# Altium PCB Beacon.PcbDoc
Units mm, origin at the board's own origin, x right, y up, seen from the top; angles counter-clockwise.
Board outline 47.6 x 56 mm, 2 copper layers (Top Layer, Bottom Layer); 43 components, 49 nets, 154 pads, 84 vias.
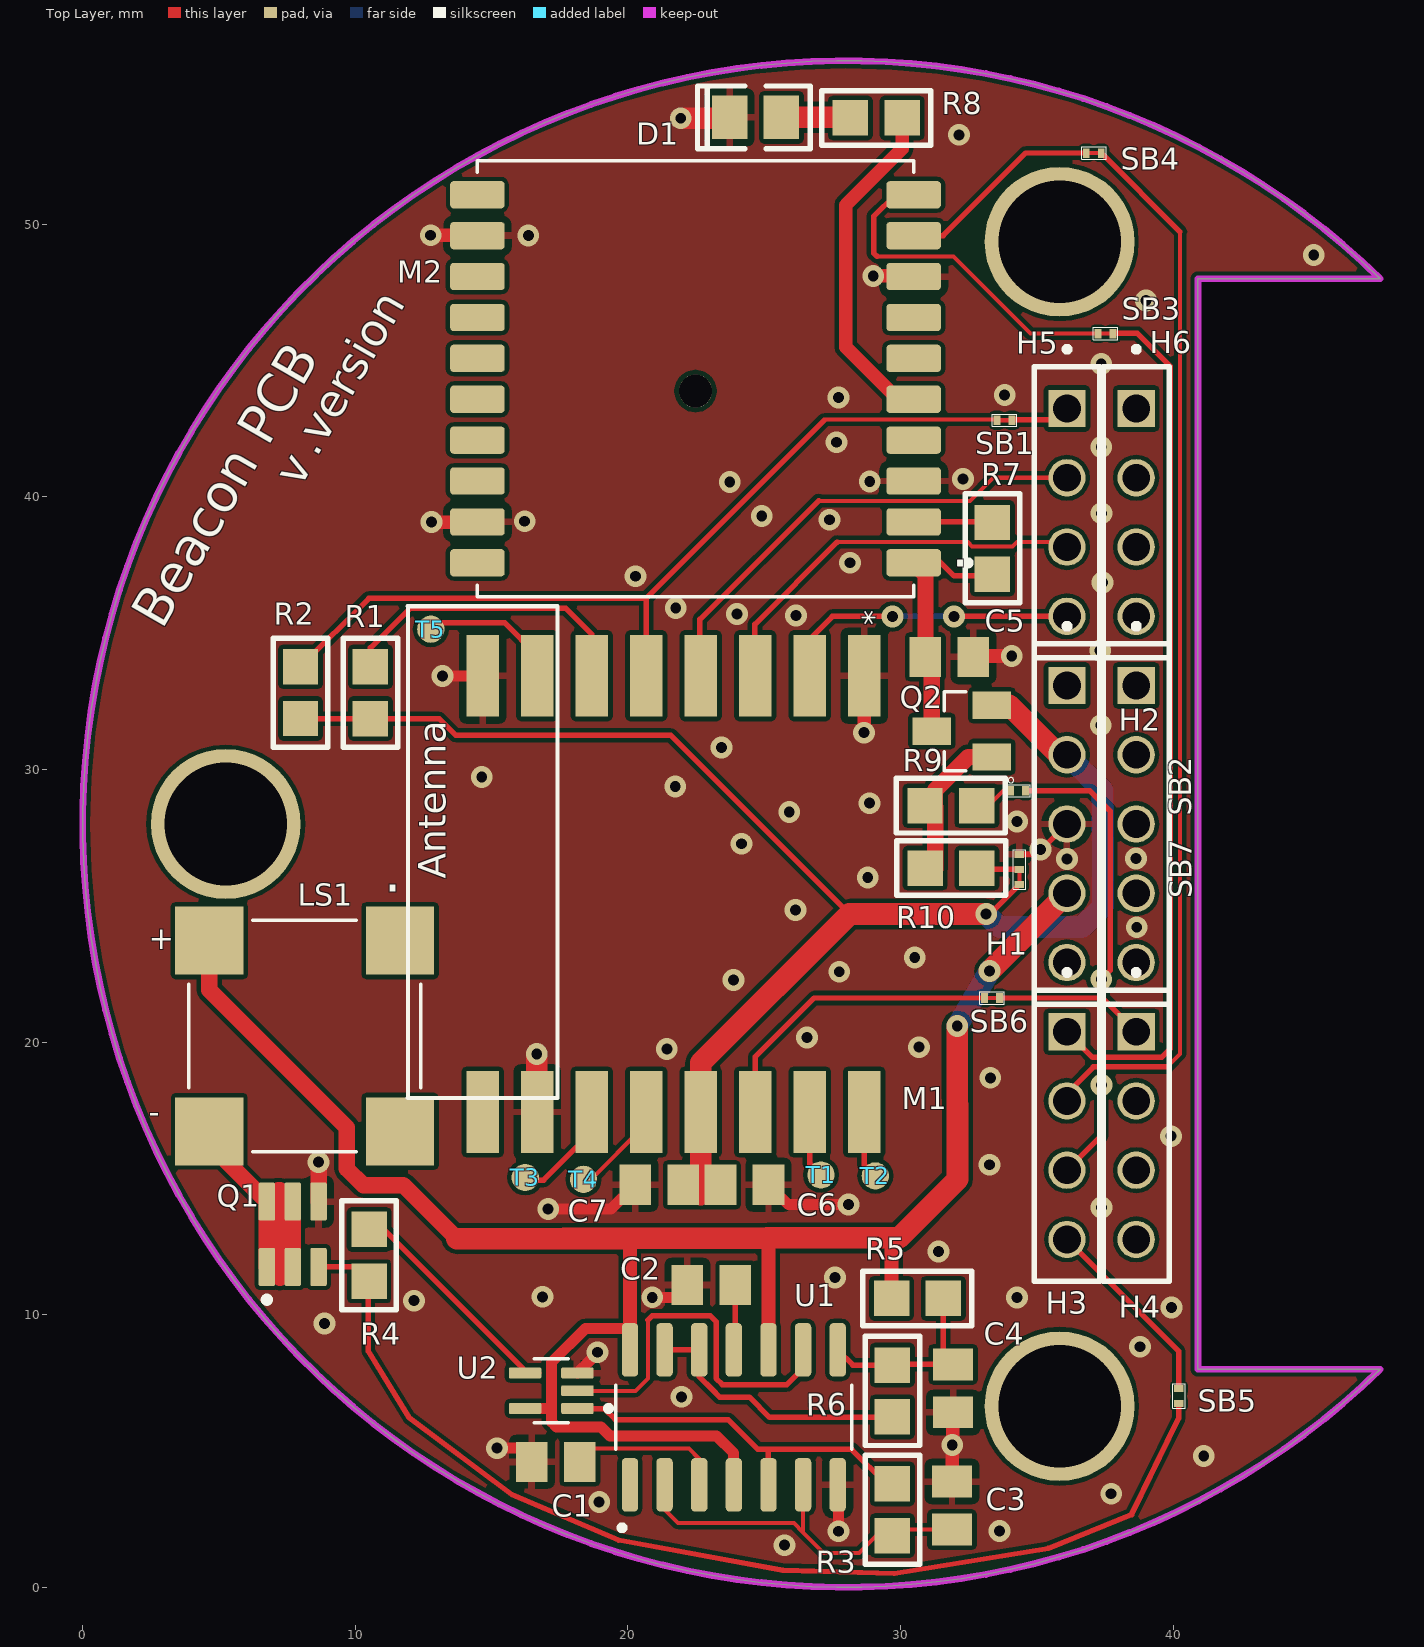
[diagram p0: Top Layer view]
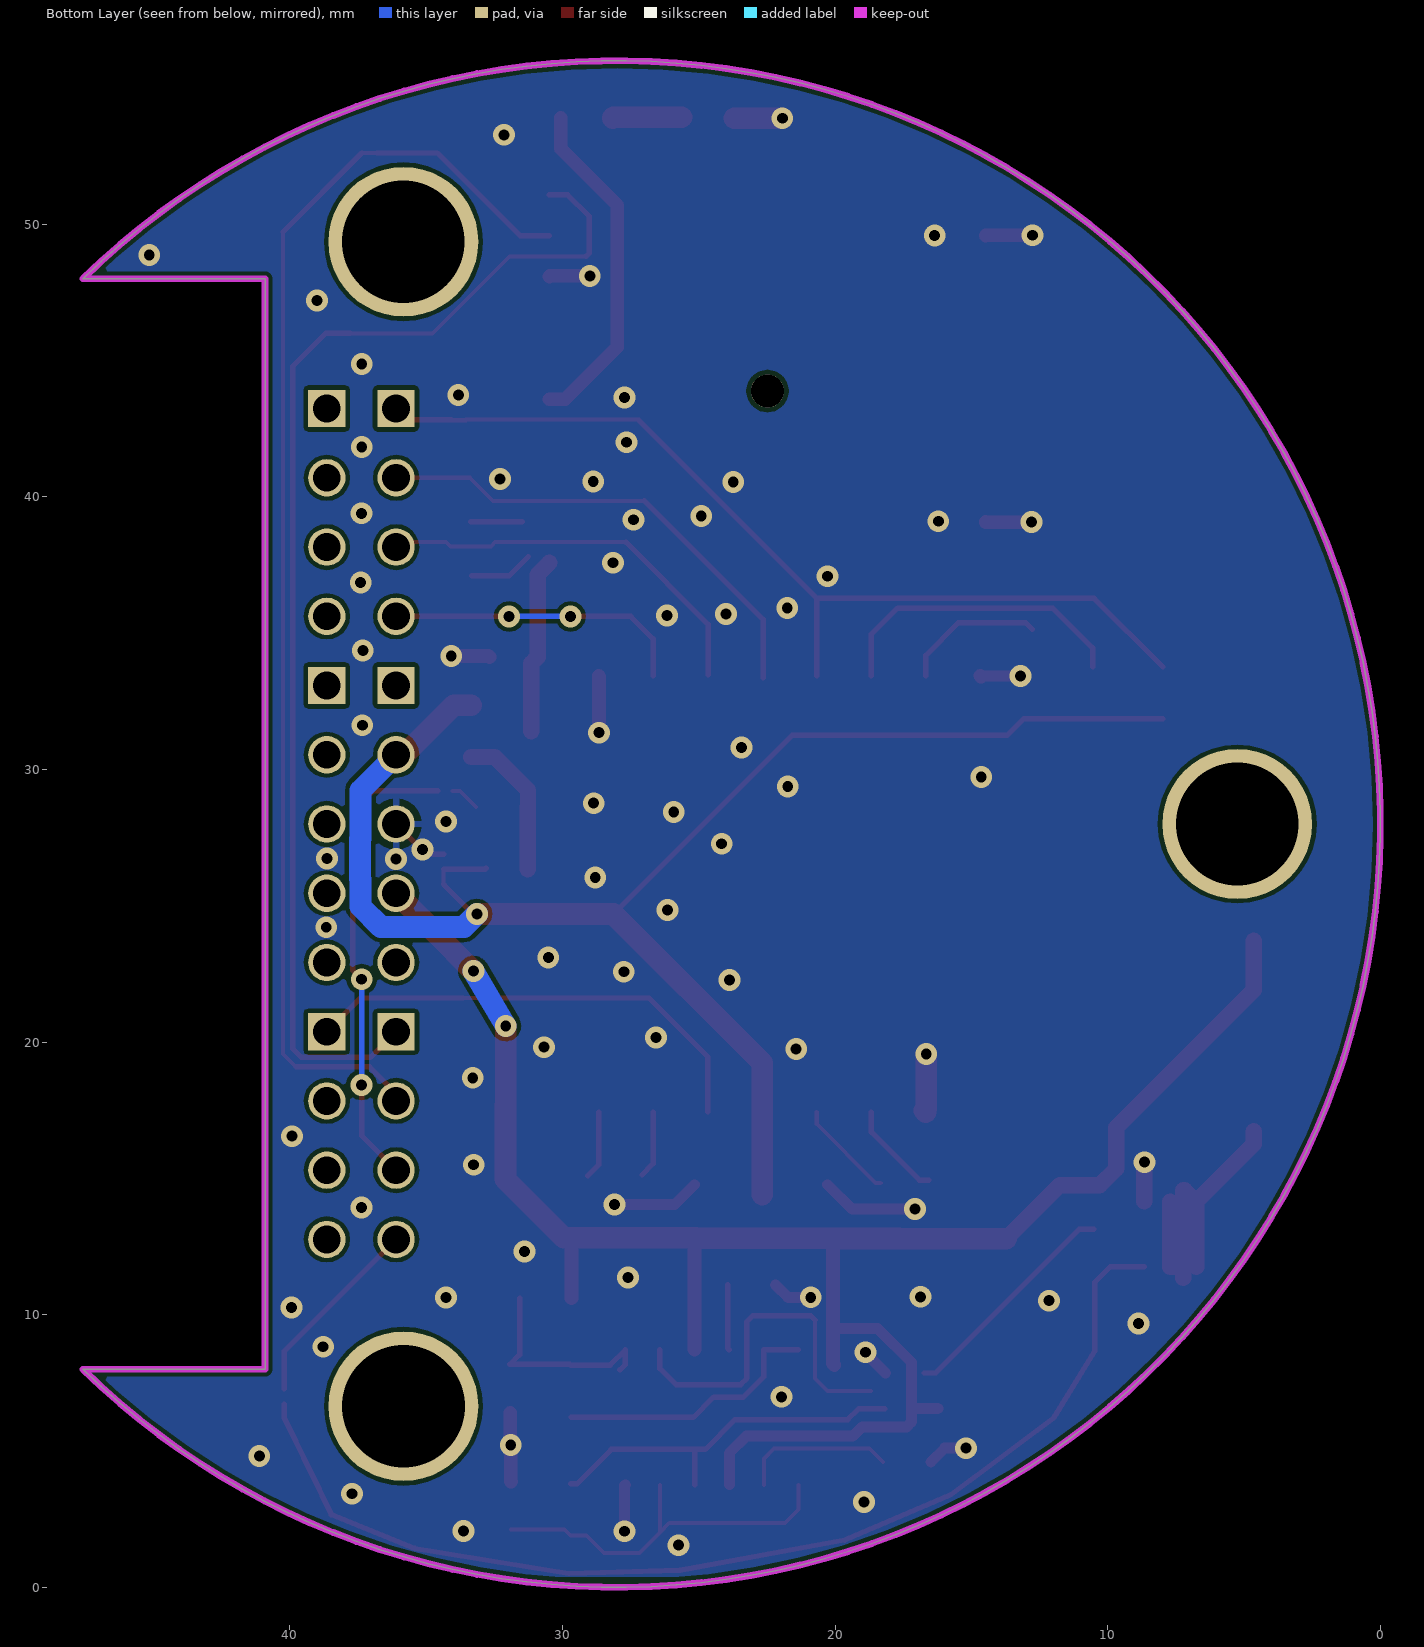
[diagram p1: Bottom Layer view, seen from below]

## Layer stack, top to bottom
Top Solder: solder mask 0.0102, Solder Resist, Dk 3.5
Top Layer: signal copper 0.0356
Dielectric 1: dielectric 0.32, FR-4, Dk 4.8
Bottom Layer: signal copper 0.0356
Bottom Solder: solder mask 0.0102, Solder Resist, Dk 3.5

## Board outline
47.596,8 cw(c28,28) 47.596,48 47.6,48 40.913,48 40.913,8

## Design rules (kind name [scope] priority, off if disabled: settings)
Clearance [All] p1: gap=0.152 ignorepadtopadclearanceinfootprint=FALSE except(0: Arc-Hole Track-Hole SMDPad-Hole THPad-Hole Via-Hole Fill-Hole Poly-Hole Region-Hole Text-Hole)
ComponentClearance [All] p1: gap=0.126 collisioncheckmode=3 verticalgap=0.254 showdistances=FALSE
HoleSize [All] p1: absolutevalues=TRUE maxlimit=6.3 minlimit=0.3 maxpercent=80.000 minpercent=20.000
PolygonConnect ViaConnect [All vs IsVia] p1: connectstyle=Direct reliefconductorwidth=0.254 reliefentries=4 polygonreliefangle="90 Angle" airgapwidth=0.254
PolygonConnect [All] p2: connectstyle=Relief reliefconductorwidth=0.254 reliefentries=4 polygonreliefangle="90 Angle" airgapwidth=0.254
RoutingVias [All] p1: holewidth=0.3 width=0.6 viastyle="Through Hole" minholewidth=0.3 minwidth=0.5 maxholewidth=1 maxwidth=5
SolderMaskExpansion [All] p1: expansion=0.102
Width [All] p1: maxlimit=25.4 minlimit=0.15 preferedwidth=0.152
28 further rules are at their usual default settings.

## Components (designator, comment, footprint, x,y, rotation, side; value= is the part's Value field where it differs from the comment)
C1 "100nF" CAPC2012X94N 17.361,4.604 r0 top
C2 "100nF" CAPC2012X94N 23.064,11.093 r0 top
C3 "1nF" CAPC2012X94N 31.891,2.999 r270 top
C4 "1uF" CAPC2012X94N 31.934,7.295 r90 top
C5 "10uF" CAPC2012X94N 31.795,34.128 r180 top
C6 "10uF" CAPC2012X94N 24.278,14.766 r180 top
C7 "100nF" CAPC2012X94N 21.156,14.767 r180 top
D1 "LTST-C170KGKT" ECE-LED2012-0805SM 24.684,53.922 r180 top
H1 "SSQ-105-03-S-S" SAMTEC_SSQ-105-03-S-S 36.107,28 r270 top locked
H2 "SSQ-105-03-S-S" SAMTEC_SSQ-105-03-S-S 38.647,28 r270 top locked
H3 "SSQ-104-02-S-S" *SAMTEC_SSQ-104-02-S-S_SSQ-104-02-S-S(Primary) 36.107,16.57 r270 top locked
H4 "SSQ-104-02-S-S" *SAMTEC_SSQ-104-02-S-S_SSQ-104-02-S-S(Primary) 38.647,16.57 r270 top locked
H5 "SSQ-104-02-S-S" *SAMTEC_SSQ-104-02-S-S_SSQ-104-02-S-S(Primary) 36.107,39.43 r270 top locked
H6 "SSQ-104-02-S-S" *SAMTEC_SSQ-104-02-S-S_SSQ-104-02-S-S(Primary) 38.647,39.43 r270 top locked
LS1 "CMT-8504-100-SMT-TR" XDCR_CMT-8504-100-SMT-TR 8.146,20.223 r0 top
M1 "LORA127X-C1" LORA127X-C1 13.674,33.435 r270 top
M2 "CD-PA1616D" XCVR_CD-PA1616D 22.482,44.331 r180 top
Q1 "TSM3446CX6_RFG" SOT-26-6 7.706,11.751 r0 top
Q2 "SSM3J328R,LF" SOT95P240X88-3N 32.25,31.407 r90 top
R1 "180k" 0805 10.558,32.818 r270 top
R2 "180k" 0805 7.991,32.819 r270 top
R3 "180k" 0805 29.703,2.848 r270 top
R4 "1k" 0805 10.511,12.178 r90 top
R5 "1Meg" 0805 30.622,10.601 r180 top
R6 "39k" 0805 29.703,7.202 r270 top
R7 "180k" 0805 33.372,38.11 r270 top
R8 "1k" 0805 29.11,53.901 r0 top
R9 "1k" 0805 31.85,28.67 r180 top
R10 "39k" 0805 31.855,26.379 r0 top
SB1 "Solder Jumper Normally Closed 0201" "SOLDER BRIDGE CLOSED 0201" 33.814,42.81 r0 top net-tie
SB2 "Solder Jumper Normally Open 0201" "Solder Bridge Open 0201"#1 34.309,29.217 r0 top
SB3 "" "Solder Bridge Closed 0201" 37.518,45.988 r0 top net-tie
SB4 "Solder Jumper Normally Closed 0201" "Solder Bridge Closed 0201" 37.091,52.613 r0 top net-tie
SB5 "Solder Jumper Normally Open 0201" "Solder Bridge Open 0201"#2 40.213,7.016 r90 top
SB6 "Solder Jumper Normally Closed 0201" "Solder Bridge Closed 0201" 33.357,21.618 r0 top net-tie
SB7 "Solder Jumper 3-pin Normally Closed 0201" "Solder Bridge 3-pin Left shorted 0201" 34.363,25.783 r90 top net-tie
T1 "Test Pad" "TEST PAD" 27.081,15.125 r0 top
T2 "Test Pad" "TEST PAD" 29.074,15.091 r0 top
T3 "Test Pad" "TEST PAD" 16.231,15.032 r0 top
T4 "Test Pad" "TEST PAD" 18.368,14.964 r0 top
T5 "Test Pad" "TEST PAD" 12.768,35.144 r0 top
U1 "TLC556CDR" SOIC127P600X175-14N 23.887,6.234 r90 top
U2 "SN74AHC1G02DCKR" SOT65P210X110-5N 17.19,7.212 r180 top

## Footprints (in the part's own frame and the unit in brackets; to place one, negate y for a bottom-side part, rotate by r counter-clockwise, add the part's x,y. Pads: shape width x height; smd on the part's side, far side on the other; paste and mask are expansions set on the pad)
0805 [mm]
  rect 1.3x1.3 smd: 1(-0.95,0) 2(0.95,0)
  silkscreen extent -2,-1 2,1, body extent -1.1,-0.72 1.1,0.73, height 1.1
*SAMTEC_SSQ-104-02-S-S_SSQ-104-02-S-S(Primary) [mm]
  rect 1.37x1.37 hole 1.02: 01(-3.81,0)
  round 1.37 hole 1.02: 02(-1.27,0) 03(1.27,0) 04(3.81,0)
  silkscreen extent -6.08,-1.2 5.34,1.2
CAPC2012X94N [mm]
  rect 1.16x1.47 smd: 1(-0.88,0) 2(0.88,0)
  body extent -1.02,-0.7 1.02,0.7, height 1.23
ECE-LED2012-0805SM [mm] "RED AS AlGaAs SMD LED, Body; 2mm x 1.25 mm (LxW)"
  rect 1.3x1.6 smd: 1(-0.95,0) 2(0.95,0)
  silkscreen extent -2,-1.15 2.13,1.15
LORA127X-C1 [mm]
  rect 3x1.2 smd paste+0 mask+0: 1(0,15) 2(0,13) 3(0,11) 4(0,9) 5(0,7) 6(0,5) 7(0,3) 8(0,1) 9(16,1) 10(16,3) 11(16,5) 12(16,7) 13(16,9) 14(16,11) 15(16,13) 16(16,15)
  body extent 0,0 16,16, height 2.1
SAMTEC_SSQ-105-03-S-S [mm]
  rect 1.37x1.37 hole 1.02: 1(-5.08,0)
  round 1.37 hole 1.02: 2(-2.54,0) 3(0,0) 4(2.54,0) 5(5.08,0)
  silkscreen extent -7.35,-1.2 6.61,1.2, body extent -6.6,-1.21 6.6,1.21, height 8.51
SOIC127P600X175-14N [mm]
  rrect50% 1.97x0.6 smd: 1(-2.475,3.81) 2(-2.475,2.54) 3(-2.475,1.27) 4(-2.475,0) 5(-2.475,-1.27) 6(-2.475,-2.54) 7(-2.475,-3.81) 8(2.475,-3.81) 9(2.475,-2.54) 10(2.475,-1.27) 11(2.475,0) 12(2.475,1.27) 13(2.475,2.54) 14(2.475,3.81)
  silkscreen extent -4.15,-4.33 1.17,4.33, body extent -3,-4.28 3,4.28, height 1.8
"Solder Bridge 3-pin Left shorted 0201" [mm]
  rect 0.25x0.35 smd paste-100 mask+0: 1(0.55,0) 2(0,0) 3(1.1,0)
  Top Layer lines w0.15: 0,0 0.55,0
  silkscreen extent -0.18,-0.23 1.27,0.23
"SOLDER BRIDGE CLOSED 0201" [mm]
  rect 0.25x0.35 smd paste+0 mask+0: 1(-0.275,0) 2(0.275,0)
  Top Layer lines w0.15: -0.275,0 0.275,0
  silkscreen extent -0.45,-0.23 0.45,0.23
"Solder Bridge Closed 0201" [mm]
  rect 0.25x0.35 smd paste+0 mask+0: 1(-0.275,0) 2(0.275,0)
  Top Layer lines w0.15: -0.275,0 0.275,0
  silkscreen extent -0.45,-0.23 0.45,0.23
"Solder Bridge Open 0201"#1 [mm]
  rect 0.25x0.35 smd paste-100 mask+0: 1(-0.275,0) 2(0.275,0)
  silkscreen extent -0.45,-0.23 0.45,0.23
"Solder Bridge Open 0201"#2 [mm]
  rect 0.25x0.35 smd paste+0 mask+0: 1(-0.275,0) 2(0.275,0)
  silkscreen extent -0.45,-0.23 0.45,0.23
SOT65P210X110-5N [mm]
  rrect25% 1.19x0.4 smd: 1(-0.96,0.65) 2(-0.96,0) 3(-0.96,-0.65) 4(0.96,-0.65) 5(0.96,0.65)
  silkscreen extent -2.2,-1.17 0.63,1.17, body extent -1.05,-1 1.05,1, height 1.1
SOT95P240X88-3N [mm]
  rect 1x1.4 smd: 1(-0.95,-1.1) 2(0.95,-1.1) 3(0,1.1)
  silkscreen extent -1.9,-1.9 1.45,0.65, body extent -1.4,-1.2 1.4,1.2, height 0.88
SOT-26-6 [mm]
  rrect20% 0.6x1.4 smd: 1(-0.95,0) 2(0,0) 3(0.95,0) 4(0.95,2.4) 5(0,2.4) 6(-0.95,2.4)
  silkscreen extent -1.05,-1.3 -0.85,-1.1, body extent -1.43,-0.18 1.48,2.62, height 1.55
"TEST PAD" [mm] "Exposed copper pad"
  round 1 smd: 1(0.004,0.001)
XCVR_CD-PA1616D [mm]
  rrect25% 2x1 smd: 1(-8,6.75) 2(-8,5.25) 3(-8,3.75) 4(-8,2.25) 5(-8,0.75) 6(-8,-0.75) 7(-8,-2.25) 8(-8,-3.75) 9(-8,-5.25) 10(-8,-6.75) 11(8,-6.75) 12(8,-5.25) 13(8,-3.75) 14(8,-2.25) 15(8,-0.75) 16(8,0.75) 17(8,2.25) 18(8,3.75) 19(8,5.25) 20(8,6.75)
  round 1.21 hole 1.21 unplated: ""(0,0.45)
  silkscreen extent -10.1,-8 8,8, body extent -8,-8 8,8, height 6.7
XDCR_CMT-8504-100-SMT-TR [mm]
  rect 2.5x2.5 smd: 1(3.5,3.5) 2(3.5,-3.5) N(-3.5,-3.5) P(-3.5,3.5)
  silkscreen extent -4.25,-4.25 4.25,4.25, body extent -4.25,-4.25 4.28,4.28, height 4

## Part data
C1 C2 C3 C4 C5 C6 C7: library part "CAP 0805", "Capacitor", IsInLabBook=Yes
D1: library part LED, "LED"
H1 H2: Package=None, Availability=Unavailable, MF="{'manufacturer': u'Samtec Inc.'}", MP=SSQ-105-03-S-S, Price=None
LS1: "8.5 mm, 5 Vo-p, 100 dB, Surface Mount (SMT), Magnetic Audio Transducer Buzzer", Package="CUI Devices", Availability="In Stock", Check_prices=https://www.snapeda.com/parts/CMT-8504-100-SMT-TR/CUI+Devices/view-part/?ref=eda, CUI_purchase_URL=https://www.cuidevices.com/product/audio/buzzers/audio-transducers/cmt-8504-100-smt-tr?utm_source=snapeda.com&utm_medium=referral&utm_campaign=snapedaBOM, MF="CUI Devices", MP=CMT-8504-100-SMT-TR, Price=None, Purchase-URL=https://pricing.snapeda.com/search/part/CMT-8504-100-SMT-TR/?ref=eda, SnapEDA_Link=https://www.snapeda.com/parts/CMT-8504-100-SMT-TR/CUI+Devices/view-part/?ref=snap
M1: "LoRa transceiver"
M2: "CD-PA1616D GNSS patch antenna module", Package=Package, Availability="Not in stock", Check_prices=https://www.snapeda.com/parts/CD-PA1616D/CD+Top/view-part/?ref=eda, MF="CD Top", MP=CD-PA1616D, Price=None, SnapEDA_Link=https://www.snapeda.com/parts/CD-PA1616D/CD+Top/view-part/?ref=snap
Q1: "N-channel MOSFET", Package=None, Availability=Unavailable, MF="{'manufacturer': u'Taiwan Semiconductor'}", MP=TSM3446CX6_RFG, Price=None
Q2: "P-Channel MOSFET 20V 6A _Ta_ 1W _Ta_ Surface Mount SOT-23F", Package="SOT-23 Toshiba", Availability=Unavailable, MF=Toshiba, MP=SSM3J328R,LF, Price=None, SnapEDA_Link=https://www.snapeda.com/parts/SSM3J328R,LF/Toshiba%20Semiconductor%20and%20Storage/view-part/214715/?ref=snap
R1 R2 R3 R4 R5 R6 R7 R8 R9 R10: library part Resistor, "Resistor", IsInLabBook=Yes
SB3: library part "Solder Jumper Normally Closed 0201", DEBUG=DEBUG
U1: "Dual 555 Timer", Package=None, Availability=Unavailable, MP=TLC556CDR, Price=None
U2: "NOR gate", Package=None, Availability=Unavailable, MP=SN74AHC1G02DCKR, Price=None
H3 H4 H5 H6: Check_prices=https://www.snapeda.com/parts/SSQ-104-02-S-S/Samtec/view-part/?ref=eda, SnapEDA_Link=https://www.snapeda.com/parts/SSQ-104-02-S-S/Samtec/view-part/?ref=snap
SB1 SB2 SB4 SB5 SB6 SB7: DEBUG=DEBUG

## Free pads (board coordinates)
  round 5.5 hole 4.5: 1(5.25,28) 1(35.837,6.643) 1(35.837,49.357)

## Via types
v1: diameter 0.8, hole 0.4, Top Layer to Bottom Layer, tented both sides, 78 vias
v2: diameter 0.8, hole 0.4, Top Layer to Bottom Layer, tented bottom, 6 vias

## Nets (pads, with @x,y where several pads share a name; then routed paths per layer and width w, separated by ;. In a path a pad name is that pad's centre, name@x,y a point inside that pad or via, vN(x,y) a via of type N, cw(c..) or ccw(c..) an arc to the next point about the centre after c; other vN are vias at no path point)
1V8: H1.1
1V8_EN: H2.3
1V8_PG: H2.1
3V3: C6.2 C7.1 H1.2 M1.13 Q2.2 R1.2 R2.2 SB7.2 | length 56.7
  Top Layer w0.2: R2.2 10.557,31.869 R1.2 13.073,31.868 13.678,31.263 21.571,31.263 28.135,24.699 ; v2(33.143,24.699) 33.279,24.699 SB7.2
  Top Layer w0.8: 22.674,14.411 22.674,14.767 M1.13 22.674,19.239 28.135,24.699 v2(33.143,24.699) ; Q2.2 33.989,32.357 35.806,30.54 H1.2
  Bottom Layer w0.8: v2(33.143,24.699) 33.62,24.223 36.66,24.223 37.41,24.972 37.41,25.973 37.429,25.992 37.429,27.448 37.41,27.468 37.41,29.237 H1.2
3V3_EN: H2.4
3V3_PG: H2.2
5V: H1.4 LS1.P R5.2 U1.4 U1.10 U1.14 U2.5 | length 73.3
  Top Layer w0.4: U2.5 17.193,6.562 17.199,6.568 ; U1.14@20.042,9.497 18.443,9.497 17.199,8.254 17.199,6.568 ; U1.14@20.077,9.292 U1.14@20.084,9.292 ; U1.4@23.87,3.776 23.87,4.934 23.25,5.553 19.35,5.553 19.018,5.885 17.386,5.885 17.199,6.071 17.199,6.568
  Top Layer w0.5: U1.14@20.027,8.154 20.077,8.204 U1.14 20.077,9.292 20.077,12.779 20.058,12.798 ; U1.14@20.084,8.716 U1.14@20.084,9.292 ; 25.11,12.81 25.157,12.763 U1.10 ; R5.2 29.672,12.539 29.953,12.82
  Top Layer w0.6: LS1.P 4.646,21.91 9.692,16.864 9.692,15.358 10.3,14.75 11.767,14.75 13.732,12.785
  Top Layer w0.8: 13.732,12.785 17.678,12.793 20.058,12.798 25.11,12.81 29.953,12.82 32.095,14.971 v1(32.082,20.593) ; v2(33.268,22.603) H1.4
  Bottom Layer w0.8: v1(32.082,20.593) v2(33.268,22.603)
5V_EN: H2.5
GND: C1.1 C2.1 C3.1 C4.1 C5.1 C6.1 C7.2 D1.2 H1.3 M1.1 M1.8 M1.10 M2.3 M2.8 M2.12 M2.19 Q1.4 SB7.3 U1.7 U2.3 | length 32.6
  Top Layer w0.2: SB7.3 34.99,26.883 H1.3
  Top Layer w0.4: v1(13.201,33.425) 14.636,33.425 M1.8@14.65,33.411 ; v1(15.201,5.103) 15.982,5.103 C1.1 ; v1(17.076,13.874) 19.383,13.874 C7.2 ; U2.3 18.885,8.597 v1(18.885,8.623) ; v1(20.894,10.638) 21.729,10.638 C2.1 ; C6.1 25.886,14.037 v1(28.091,14.037) ; U1.7 27.726,3.73 v1(27.726,2.057)
  Top Layer w0.5: v1(12.766,49.595) 14.468,49.595 M2.12 ; v1(12.796,39.073) 14.456,39.073 14.465,39.064 M2.19 ; M1.8@14.65,33.411 M1.8 ; D1.2@23.699,53.887 D1.2 ; v1(28.665,31.351) 28.665,33.426 M1.1 ; v1(29,48.104) 30.459,48.104 M2.8 ; C3.1 31.9,3.888 v1(31.9,5.215) ; v1@31.917,5.232 C4.1@31.917,6.398 ; C5.1 32.712,34.164 v1(34.083,34.164)
  Top Layer w0.6: Q1.4 v1(8.657,15.595)
  Top Layer w0.8: v1(16.658,19.565) 16.658,17.559 16.728,17.489 M1.10 ; v1(21.938,53.887) D1.2@23.699,53.887
  other v1: 25.748,1.545 33.63,2.066 18.947,3.134 37.729,3.431 41.123,4.82 21.971,6.987 38.781,8.825 8.874,9.677 39.941,10.259 12.153,10.515 16.871,10.655 34.27,10.631 27.597,11.367 31.391,12.319 37.379,13.938 33.26,15.501 39.925,16.548 33.295,18.689 21.429,19.745 30.681,19.813 26.568,20.168 23.878,22.282 27.753,22.582 30.522,23.105 38.667,24.211 26.148,24.85 28.801,26.034 36.113,26.714 38.645,26.733 35.134,27.068 24.163,27.274 34.274,28.089 25.919,28.438 28.858,28.763 21.739,29.374 14.641,29.726 23.438,30.805 37.345,31.622 37.325,34.369 26.163,35.654 23.999,35.706 21.757,35.927 37.405,36.858 20.284,37.088 28.145,37.583 16.216,39.107 27.402,39.16 24.912,39.304 37.375,39.396 23.739,40.542 28.872,40.565 32.291,40.655 37.365,41.834 27.649,42.002 27.728,43.645 33.822,43.732 37.365,44.87 39.01,47.204 45.161,48.873 16.349,49.586 32.143,53.28
"GPS R\e\s\e\t\": M2.2 R7.1 | length 1.9
  Top Layer w0.2: 31.482,39.081 R7.1@33.372,39.081
GPS_3V3: C5.2 M2.1 Q2.3 R7.2 | length 8.8
  Top Layer w0.2: M2.1@31.251,37.812 31.963,37.1 R7.2@33.325,37.1
  Top Layer w0.6: M2.1 30.915,37.148 C5.2 31.15,33.893 Q2.3
GPS_EN: R9.1 SB2.1 | length 1.1
  Top Layer w0.15: R9.1@33.167,28.629 33.755,29.217 SB2.1
GPS_UART_RX: M2.10 SB3.1 | length 12.6
  Top Layer w0.15: 29.142,48.819 31.943,48.819 34.766,45.996 SB3.1@37.243,45.996
  Top Layer w0.2: 29.142,48.819 29.027,48.934 29.027,50.297 29.811,51.081 M2.10
GPS_UART_TX: M2.9 SB4.1 | length 7.6
  Top Layer w0.2: M2.9 31.561,49.581 34.593,52.613 SB4.1
I2C_SCL: M2.14
I2C_SDA: M2.15
"LoRa Antenna": M1.9
"LoRa C\S\": M1.5 R2.1 SB1.1 | length 32.1
  Top Layer w0.15: 27.202,42.834 SB1.1@33.552,42.834
  Top Layer w0.2: R2.1 10.496,36.274 20.668,36.274 ; M1.5 20.674,36.268 20.668,36.274 ; 27.202,42.809 20.668,36.274
"LoRa IRQ": M1.14 SB6.1 | length 11.3
  Top Layer w0.2: M1.14 24.674,19.465 26.827,21.618 SB6.1
"LoRa R\e\s\e\t\": M1.6 R1.1 | length 11.3
  Top Layer w0.2: R1.1 10.558,34.46 12.02,35.922 17.714,35.922 18.674,34.961 M1.6
"Manual Buzzer Control": Q1.3 R4.1 SB5.1 | length 40.1
  Top Layer w0.2: Q1.3 9.915,11.751 10.473,11.192 10.473,8.666 11.972,6.227 15.735,3.405 19.656,1.733 25.678,0.622 29.779,0.507 35.422,1.425 38.478,2.67 40.207,6.205 SB5.1@40.207,6.722
MISO: H5.04 M1.2 | length 11.1
  Top Layer w0.2: M1.2 26.674,34.789 27.505,35.62 27.511,35.614 v2(29.706,35.614) ; v2(31.959,35.614) 36.101,35.614 H5.04
  Bottom Layer w0.2: v2(29.706,35.614) v2(31.959,35.614)
MOSI: H5.03 M1.3 | length 14.7
  Top Layer w0.15: 27.675,38.34 32.471,38.34 32.628,38.183 34.116,38.183 34.273,38.34 H5.03@35.927,38.34
  Top Layer w0.2: M1.3@24.661,33.477 24.661,35.326 27.675,38.34 ; H5.03@35.927,38.34 H5.03
NetC1_2: C1.2 U1.3 | length 5.7
  Top Layer w0.15: C1.2 18.733,5.096 22.237,5.096 22.617,4.716 U1.3
NetC2_2: C2.2 U1.11 | length 2.4
  Top Layer w0.2: U1.11 23.944,8.766 C2.2
NetC3_2: C3.2 R3.2 U1.2 U1.6 | length 14.2
  Top Layer w0.15: U1.2 21.347,2.849 21.84,2.356 26.087,2.356 26.427,2.016 ; U1.6 26.427,2.016 ; C3.2 29.925,2.119 R3.2 29.119,1.898 28.486,1.265 27.178,1.265 26.427,2.016
NetC4_2: C4.2 R5.1 R6.1 U1.8 | length 7.9
  Top Layer w0.2: U1.8@27.893,7.974 27.697,8.17 U1.8 28.254,8.152 R6.1 29.726,8.175 C4.2 31.572,8.536 R5.1
NetD1_1: D1.1 R8.1 | length 2.5
  Top Layer w0.8: D1.1 28.139,53.922 R8.1
NetH3_01: H3.01 SB3.2 | length 31.9
  Top Layer w0.2: H3.01 37.044,19.443 39.582,19.443 39.901,19.761 39.901,44.786 38.691,45.996 SB3.2@37.793,45.996
NetH3_02: H3.02 SB4.2 | length 39.3
  Top Layer w0.15: 39.776,19.09 40.254,19.567 40.254,49.725
  Top Layer w0.2: H3.02 36.107,18.123 37.074,19.09 39.776,19.09 ; SB4.2 40.254,49.725
NetH3_03: H3.03 SB2.2 | length 17.3
  Top Layer w0.2: SB2.2 36.951,29.217 37.694,28.474 37.694,22.631 v2(37.368,22.305) ; H3.03 37.373,16.566 v2(37.373,18.431)
  Bottom Layer w0.2: v2(37.368,22.305) 37.368,18.437 v2(37.373,18.431)
NetH3_04: H3.04 SB5.2 | length 7.2
  Top Layer w0.2: H3.04 40.213,8.654 SB5.2
NetH4_01: H4.01 SB6.2 | length 5.5
  Top Layer w0.2: SB6.2 37.409,21.618 H4.01
NetH5_01: H5.01 SB1.2 | length 2.2
  Top Layer w0.2: SB1.2@34.089,42.825 35.692,42.825 H5.01
NetLS1_N: LS1.N Q1.1 Q1.2 Q1.5 Q1.6 | length 12.6
  Top Layer w0.6: LS1.N 4.646,16.261 Q1.6 ; Q1.1 Q1.6 ; 7.237,11.345 7.237,11.751 ; Q1.5 Q1.2 7.237,11.751 ; Q1.6 7.173,14.568 7.237,14.568 7.237,11.751
NetM1_7: M1.7 T5.1 | length 5.2
  Top Layer w0.2: T5.1 13.003,35.374 15.486,35.374 16.674,34.186 M1.7
NetM1_11: M1.11 T3.1 | length 3.6
  Top Layer w0.2: T3.1@16.557,14.934 16.912,14.934 18.674,16.697 M1.11
NetM1_12: M1.12 T4.1 | length 3.7
  Top Layer w0.15: T4.1@18.328,14.836 18.519,14.836 20.674,16.992 M1.12
NetM1_15: M1.15 T1.1 | length 2.5
  Top Layer w0.2: M1.15 26.674,15.538 T1.1
NetM1_16: M1.16 T2.1 | length 2.5
  Top Layer w0.2: M1.16 28.674,15.496 T2.1
NetM2_5: M2.5 R8.2 | length 12.5
  Top Layer w0.5: R8.2 30.06,52.767 27.994,50.701 27.994,45.497 29.91,43.581 M2.5
NetQ2_1: Q2.1 R9.2 R10.1 | length 5.5
  Top Layer w0.6: R10.1@31.272,26.339 31.272,28.624 31.267,28.629 31.267,29.237 32.487,30.457 Q2.1
NetR3_1: R3.1 U1.5 U2.1 | length 14
  Top Layer w0.2: U2.1@18.173,6.558 19.13,6.558 19.539,6.149 23.679,6.149 24.765,5.064 25.157,5.064 ; U1.5 25.157,5.064 ; R3.1 29.478,3.798 28.212,5.064 25.157,5.064
NetR4_2: R4.2 U2.4 | length 8.4
  Top Layer w0.2: R4.2 11.052,13.128 16.318,7.862 U2.4@16.73,7.862
NetR6_2: R6.2 U1.12 U1.13 | length 9.9
  Top Layer w0.2: U1.13 U1.12 22.617,7.726 23.114,7.229 ; 23.114,7.229 23.367,6.976 24.459,6.976 25.197,6.238 R6.2@29.689,6.238
NetR10_2: R10.2 SB7.1 | length 1.6
  Top Layer w0.2: R10.2 32.852,26.333 SB7.1
NetU1_9: U1.9 U2.2 | length 13.3
  Top Layer w0.15: U2.2@18.687,7.201 20.275,7.201 20.735,7.661 20.735,9.805
  Top Layer w0.2: 20.735,9.805 20.899,9.969 23.014,9.969 23.236,9.747 23.236,7.664 23.466,7.434 25.837,7.434 26.427,8.024 U1.9
SCK: H5.02 M1.4 | length 17.8
  Top Layer w0.15: 26.995,39.854 32.544,39.854 33.39,40.7 H5.02
  Top Layer w0.2: M1.4@22.644,33.368 22.644,35.503 26.995,39.854
Vbat: H1.5
pads on no net: H4.02 H4.03 H4.04 H6.01 H6.02 H6.03 H6.04 LS1.1 LS1.2 M2. M2.4 M2.6 M2.7 M2.11 M2.13 M2.16 M2.17 M2.18 M2.20 U1.1

## Polygon pours and split planes (outlines as drawn)
GND on Bottom Layer "Bottom GND" (solid, remove dead copper, pour order 4): 2.205,57.363 48.37,57.363 48.37,7.375 41.376,0.382 4.39,0.382 0.119,4.653 0.119,50.322
GND on Top Layer "Top GND" (solid, remove dead copper, pour order 0): 16.166,56.289 38.255,56.289 49.461,47.016 41.351,47.016 41.351,8.438 48.561,8.438 40.123,0 15.89,0 0.094,15.797 0.094,40.216

## Keep-outs
Keep-Out Layer:
  the board outline again, w0.25

## Silkscreen, mask and mechanical layers (free items; w line width, h text height)
Top Overlay:
  lines w0.15: 11.919,35.988 17.419,35.988 ; 11.926,17.948 17.426,17.948 ; 11.928,17.958 11.928,35.958 ; 17.416,17.975 17.416,35.975
  text ".version" at 8.595,41.425 h1.2 r60
  text "v" at 7.98,40.297 h1.2 r60
  text "." at 31.861,37.445 h1.52
  text "Beacon PCB" at 2.914,35.084 h1.4 r60
  text "Antenna" at 13.311,26.001 h1 r90
  text "." at 11.042,25.514 h1.52
Mechanical 1:
  text "Battery cutout" at 46.172,24.284 h1.52 r90
Mechanical 15:
  lines w0.254: 41.46,9.025 41.46,47.025 49.46,47.025 49.46,9.025 41.46,9.025

## Text inside footprints (layer, text, board x,y; h text height)
LS1: Top Overlay "-" at 2.431,17.048 h0.81; Top Overlay "+" at 2.431,23.398 h0.81; Mechanical 13 "+" at 2.431,23.398 h0.81; Mechanical 13 "-" at 2.431,17.048 h0.81
M1: Top Overlay "*" at 28.274,35.835 h0.8 r270